# Altium PCB PCB_Pin.PcbDoc
Units mil, origin at the board's own origin, x right, y up, seen from the top; angles counter-clockwise.
Board outline 6000 x 4000 mil, 2 copper layers (Top Layer, Bottom Layer); 3 components, 0 nets, 10 pads, 0 vias.
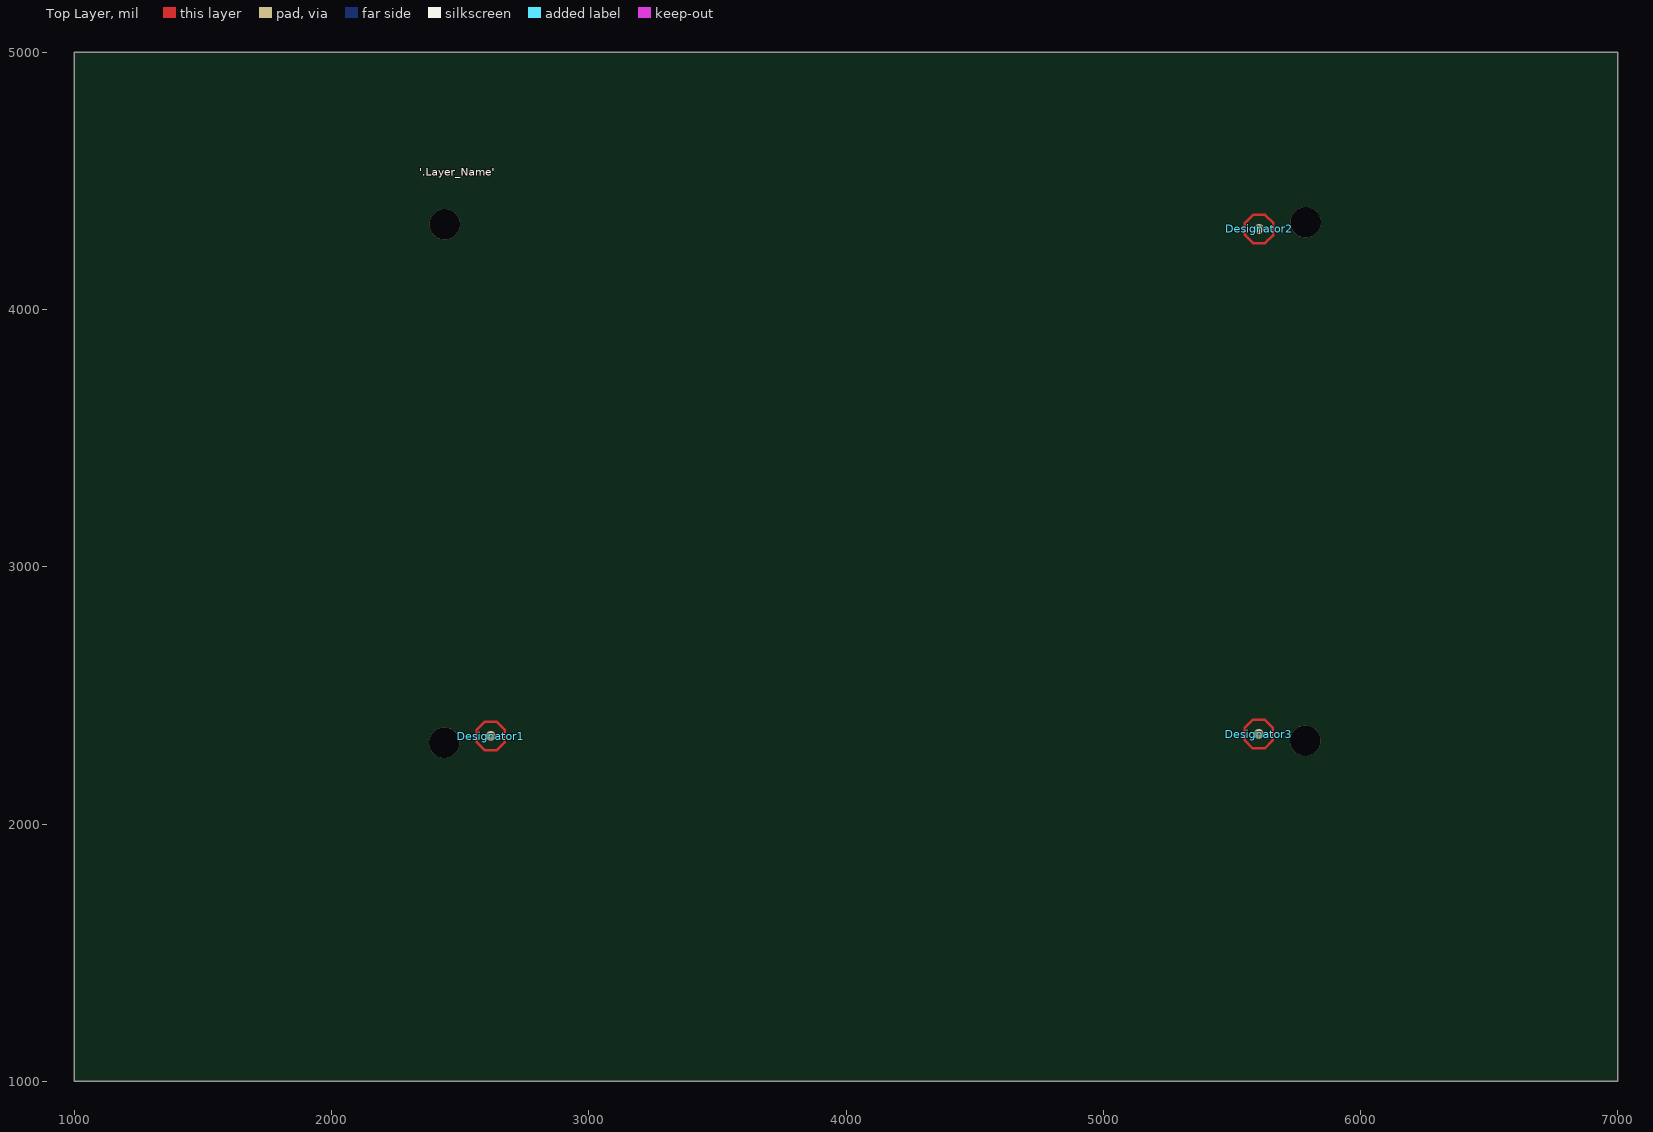
[diagram p0: Top Layer view]
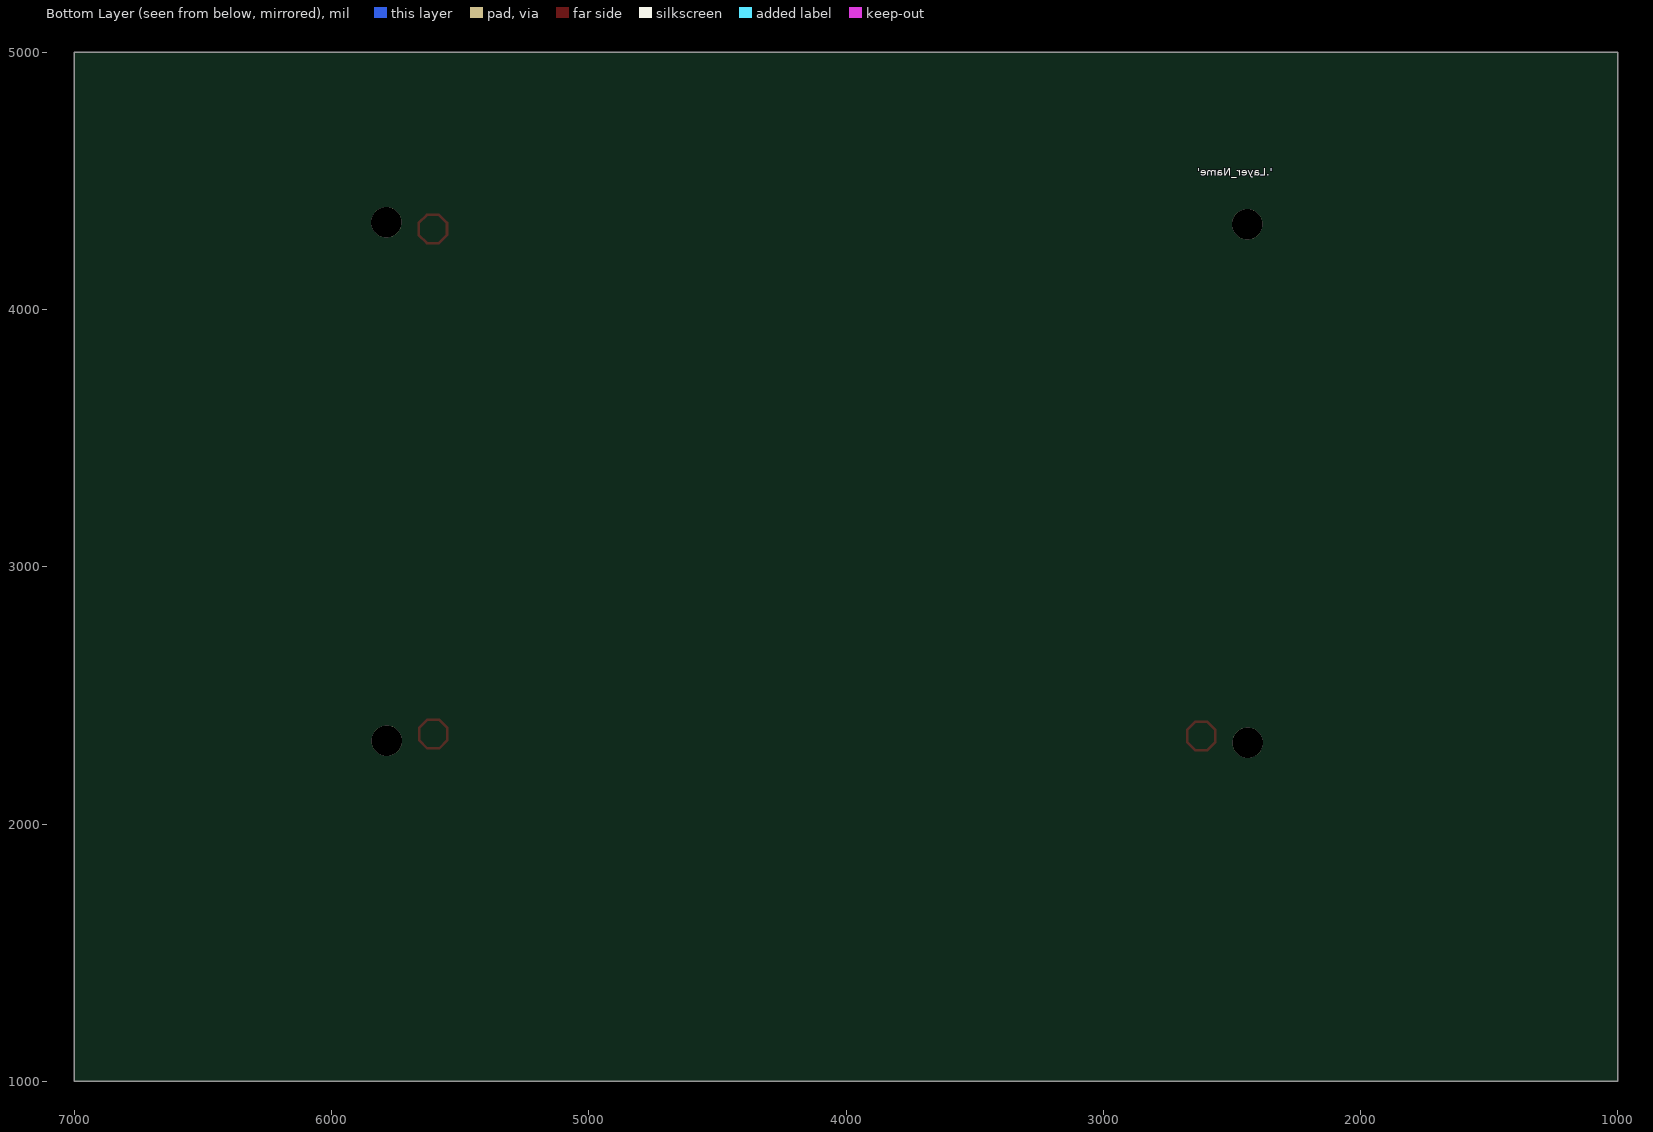
[diagram p1: Bottom Layer view, seen from below]

## Layer stack, top to bottom
Top Solder: solder mask 0.4, Solder Resist, Dk 3.5
Top Layer: signal copper 1.4
Dielectric 1: dielectric 12.6, FR-4, Dk 4.8
Bottom Layer: signal copper 1.4
Bottom Solder: solder mask 0.4, Solder Resist, Dk 3.5

## Board outline
1000,1000 7000,1000 7000,5000 1000,5000

## Design rules (kind name [scope] priority, off if disabled: settings)
Clearance [All] p1: gap=10 ignorepadtopadclearanceinfootprint=FALSE except(0: Arc-Hole Track-Hole SMDPad-Hole THPad-Hole Via-Hole Fill-Hole Poly-Hole Region-Hole Text-Hole)
PolygonConnect [All] p1: connectstyle=Relief reliefconductorwidth=10 reliefentries=4 polygonreliefangle="90 Angle" airgapwidth=10
RoutingVias [All] p1: holewidth=28 width=50 viastyle="Through Hole" minholewidth=28 minwidth=50 maxholewidth=28 maxwidth=50
SolderMaskExpansion [All] p1: expansion=4 istentingtop=FALSE
Width [All] p1: maxlimit=10 minlimit=10 preferedwidth=10
30 further rules are at their usual default settings.

## Components (designator, comment, footprint, x,y, rotation, side; value= is the part's Value field where it differs from the comment)
Designator1 "Comment" MARKS 2619,2342 r0 top
Designator2 "Comment" MARKS 5606.14,4313.25 r180 top
Designator3 "Comment" MARKS 5604.63,2349.61 r180 top

## Footprints (in the part's own frame and the unit in brackets; to place one, negate y for a bottom-side part, rotate by r counter-clockwise, add the part's x,y. Pads: shape width x height; smd on the part's side, far side on the other; paste and mask are expansions set on the pad)
MARKS [mm]
  round 2 on Top Solder: 0(0,0)
  round 1 smd: 1(0,0)
  Top Layer lines w0.254: -1.4,-0.6 -0.6,-1.4 0.6,-1.4 1.4,-0.6 1.4,0.6 0.6,1.4 0.4,1.4 -0.4,1.4 -0.6,1.4 -1.4,0.6 -1.4,-0.6

## Free pads (board coordinates)
  round 118.11 hole 118.11 unplated: 4(2438.43,2316.08) 4(2439.94,4331.56) 4(5785.2,2323.69) 4(5786.72,4339.17)

## Nets (pads, with @x,y where several pads share a name; then routed paths per layer and width w, separated by ;. In a path a pad name is that pad's centre, name@x,y a point inside that pad or via, vN(x,y) a via of type N, cw(c..) or ccw(c..) an arc to the next point about the centre after c; other vN are vias at no path point)
pads on no net: Designator1.0 Designator1.1 Designator2.0 Designator2.1 Designator3.0 Designator3.1

## Other copper
Top Layer:
  text "'.Layer_Name'" at 2341,4521 h30
Bottom Layer:
  text "'.Layer_Name'" at 2341,4521 h30

## Silkscreen, mask and mechanical layers (free items; w line width, h text height)
Top Overlay:
  text "'.Layer_Name'" at 2341,4521 h30
Bottom Overlay:
  text "'.Layer_Name'" at 2341,4521 h30
Top Paste:
  text "'.Layer_Name'" at 2341,4521 h30
Bottom Paste:
  text "'.Layer_Name'" at 2341,4511 h30
Top Solder:
  text "'.Layer_Name'" at 2341,4521 h30
Bottom Solder:
  text "'.Layer_Name'" at 2341,4511 h30
Drill Guide:
  text "'.Layer_Name'" at 2341,4511 h30
Mechanical 1:
  lines w6: 2340,2217.66 2340,2422.11 5883.63,2422.11 5883.63,2217.66 2340,2217.66 ; 2341.51,4233.14 5885.14,4233.14 5885.14,4437.59 2341.51,4437.59 2341.51,4233.14
  text "'.Layer_Name'" at 2341,4511 h30
Mechanical 2:
  text "'.Layer_Name'" at 2341,4511 h30

## Dimensions
2340,2217.66 to 5883.63,2217.66 on Mechanical 2
2340,2217.66 to 2341.51,4437.59 on Mechanical 2

## Panel: embedded boards
"Mini_sys_board.PcbDoc" at 2340,2422.11, 2 rows x 1 columns, spacing 905.51 x 1771.65, rotation 0
"Mini_sys_board.PcbDoc" at 5885.14,4233.14, 2 rows x 1 columns, spacing 905.51 x 1771.65, rotation 180